# Altium PCB HX-SMJ01.pcbdoc (part 1 of 3)
Units mm, origin at the board's own origin, x right, y up, seen from the top; angles counter-clockwise.
Board outline 198.63 x 136.78 mm, 2 copper layers (Top Layer, Bottom Layer); 359 components, 358 nets, 1307 pads, 814 vias.
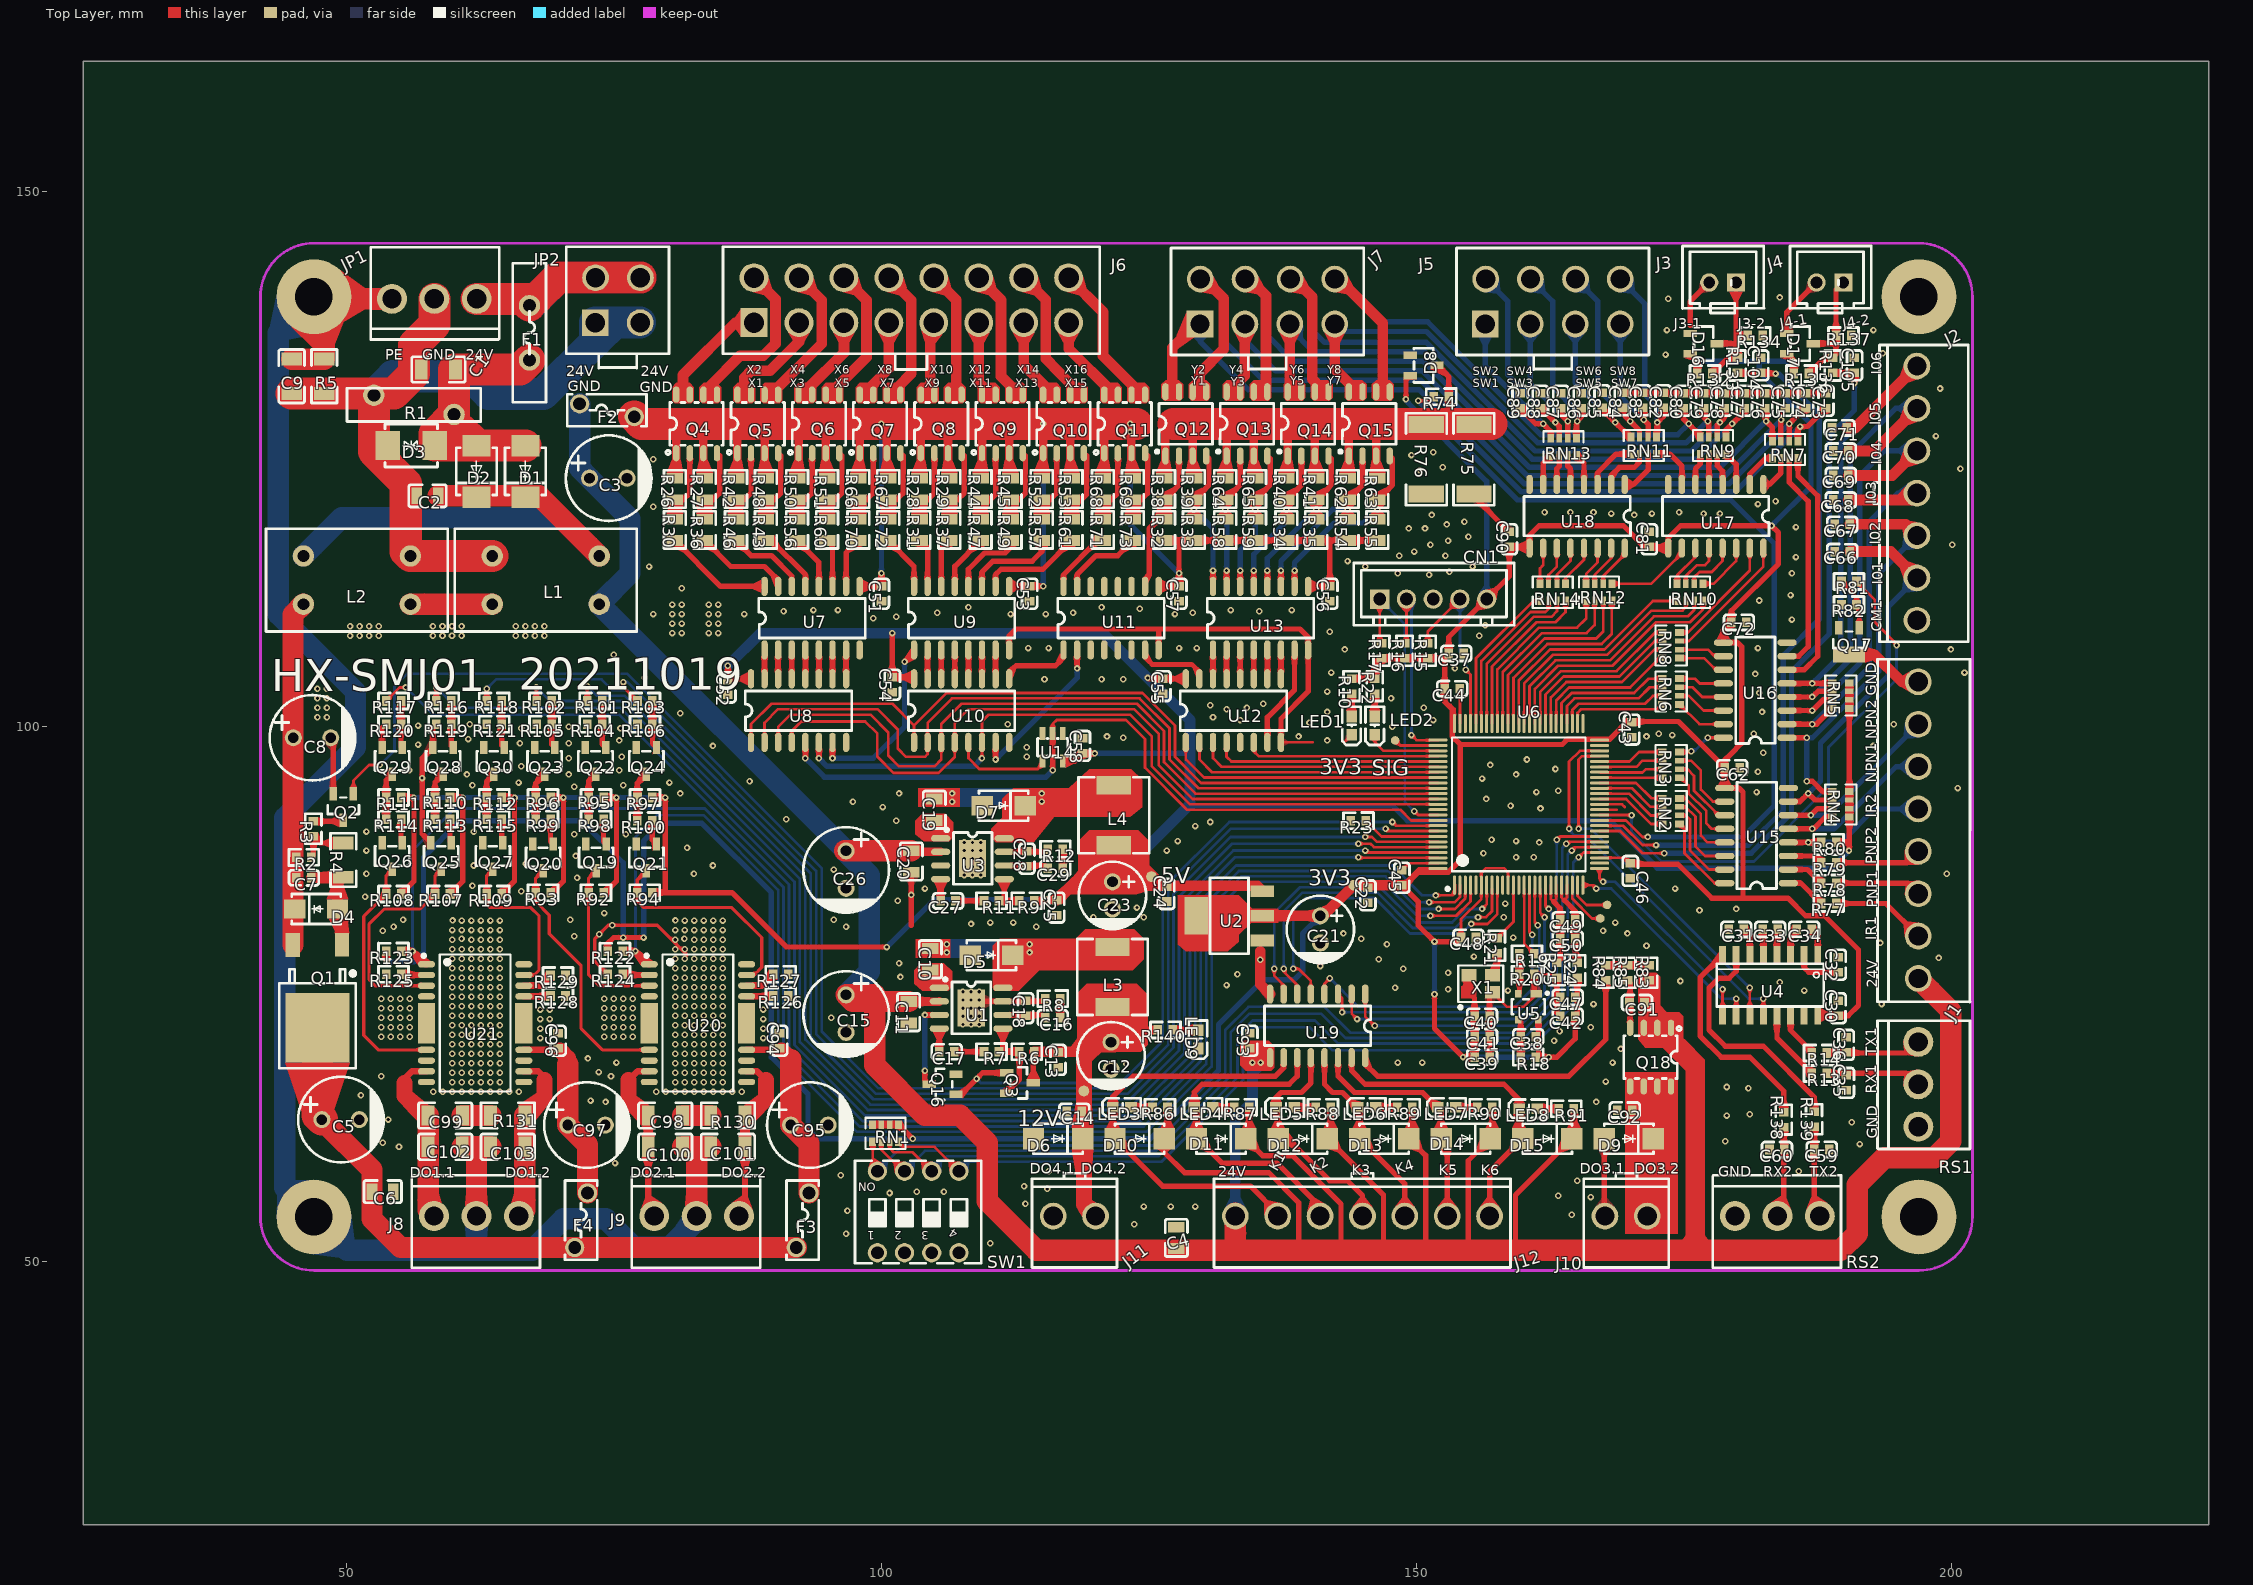
[diagram p0: Top Layer view]
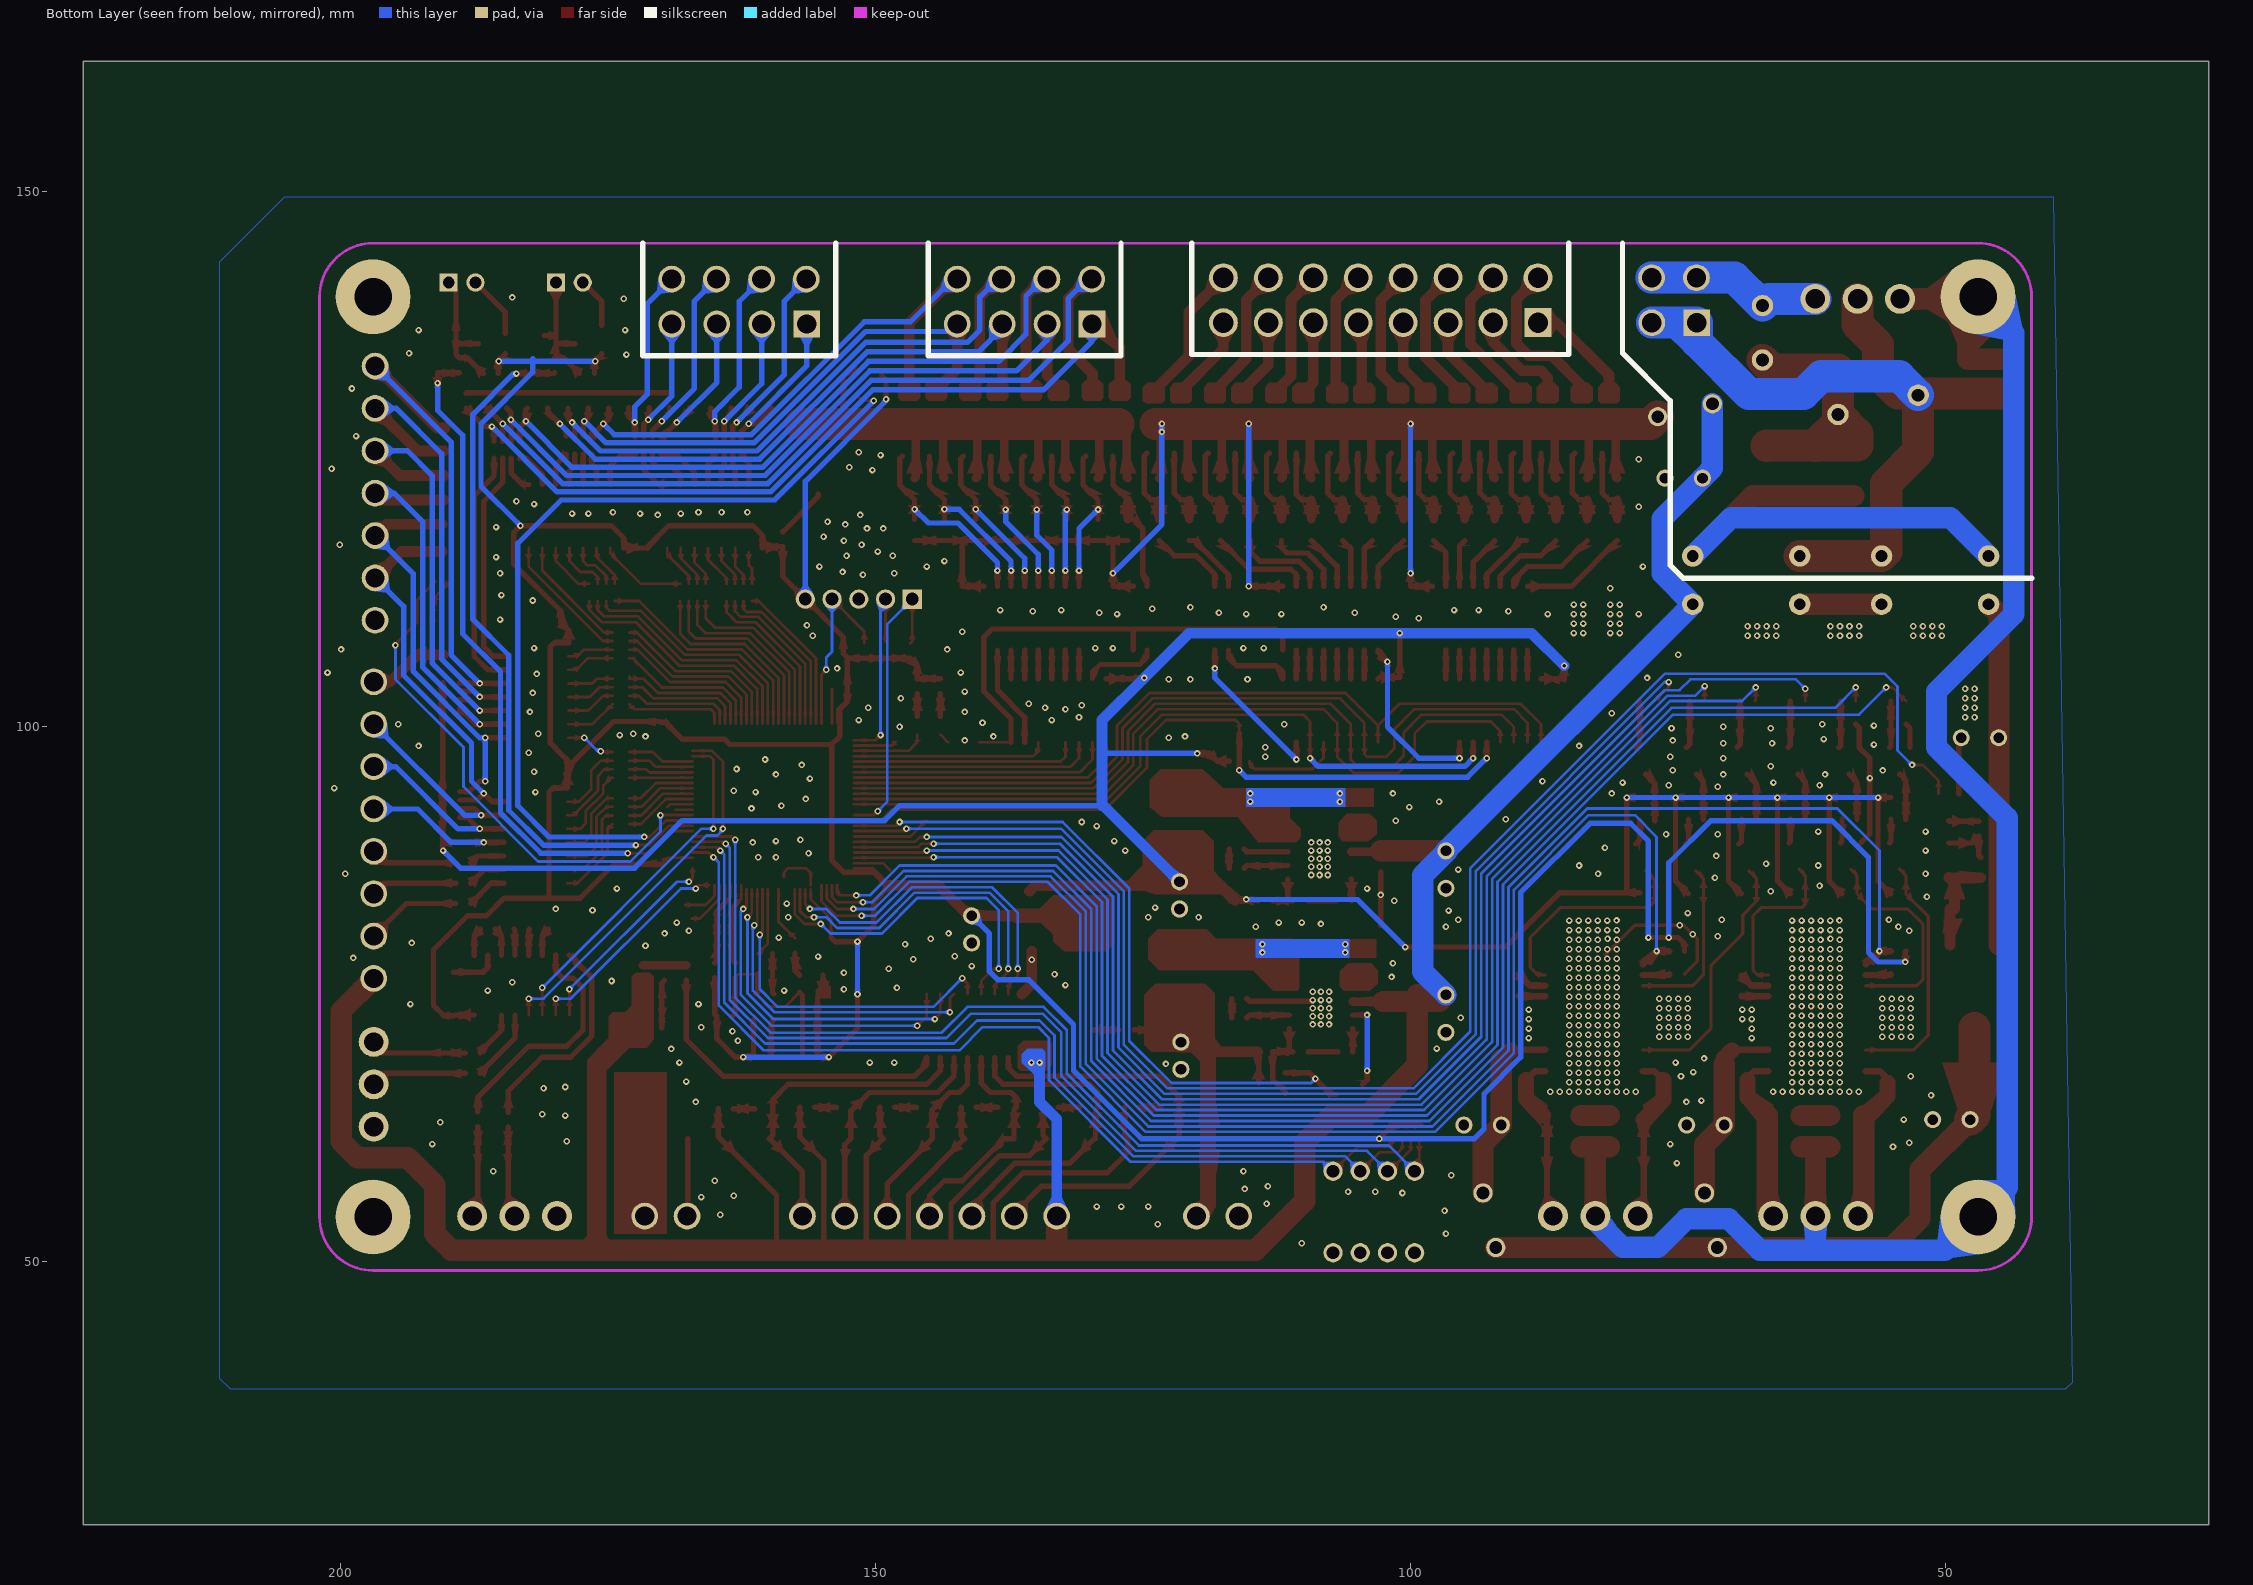
[diagram p1: Bottom Layer view, seen from below]

## Layer stack, top to bottom
Top Layer: signal copper (thickness not stored)
Dielectric: dielectric 0.32, FR-4, Dk 4.8
Bottom Layer: signal copper (thickness not stored)

## Board outline
224.028,25.4 25.4,25.4 25.4,162.179 224.028,162.179

## Components (designator, comment, footprint, x,y, rotation, side; value= is the part's Value field where it differs from the comment)
C1 "1nF/2kv" C1206 58.586,133.379 r0 top
C2 "100nF" C0805 57.57,121.568 r0 top
C3 "220uF" CAP-TH_BD8.0-P3.50-D1.0-FD 74.461,123.219 r0 top
C4 "100nF" C0805 127.546,52.226 r270 top
C5 "220uF" CAP-TH_BD8.0-P3.50-D1.0-FD 49.442,63.275 r0 top
C6 "100nF" C0805 53.378,56.544 r180 top
C7 "10nF" C0603 46.014,85.881 r180 top
C8 "220uF" CAP-TH_BD8.0-P3.50-D1.0-FD 46.775,98.962 r0 top
C9 "1nF/2kv" C1206 44.87,132.744 r270 top
C10 "100nF" C0805 104.559,78.261 r270 top
C11 "100nF" C0805 102.527,73.308 r90 top
C12 "220uF/16v" CAP-TH_BD6.3-P2.50-D1.0-FD 121.451,69.244 r270 top
C13 "100nF" C0603 116.499,68.863 r90 top
C14 "1nF" C0603 118.023,64.037 r0 top
C15 "220uF" CAP-TH_BD8.0-P3.50-D1.0-FD 96.686,73.181 r270 top
C16 "1.5nF" C0603 115.991,72.8 r180 top
C17 "8.2nF" C0603 106.085,69.625 r180 top
C18 "27pF" C0603 113.451,73.689 r270 top
C19 "100nF" C0805 104.94,92.231 r270 top
C20 "100nF" C0805 102.781,87.405 r90 top
C21 "100uF/16V" CAP-TH_BD6.3-P2.50-D1.0-FD 141.009,81.055 r270 top
C22 "100nF" C0603 145.455,84.23 r90 top
C23 "220uF/16v" CAP-TH_BD6.3-P2.50-D1.0-FD 121.578,84.23 r270 top
C24 "100nF" C0603 126.659,84.357 r90 top
C25 "1nF" C0603 116.372,83.087 r90 top
C26 "220uF" CAP-TH_BD8.0-P3.50-D1.0-FD 96.686,86.643 r270 top
C27 "8.2nF" C0603 106.212,83.722 r180 top
C28 "18pF" C0603 113.578,87.659 r270 top
C29 "820pF" C0603 116.245,86.77 r180 top
C30 "100nF" C0603 189.397,73.689 r90 top
C31 "100nF" C0603 179.872,81.055 r180 top
C32 "100nF" C0603 189.397,77.753 r270 top
C33 "100nF" C0603 183.047,81.055 r180 top
C34 "100nF" C0603 186.222,81.055 r0 top
C35 "11pF" C0603 190.158,66.704 r270 top
C36 "11pF" C0603 190.158,70.26 r90 top
C37 "100nF" C0603 153.71,106.836 r0 top
C38 "100nF" C0603 160.441,71.022 r180 top
C39 "1nF" C0603 156.123,69.117 r180 top
C40 "100nF" C0603 156.123,72.927 r0 top
C41 "100nF" C0603 156.123,71.022 r0 top
C42 "1uF" C0603 164.124,72.927 r0 top
C43 "100nF" C0603 170.093,99.724 r270 top
C44 "100nF" C0603 153.329,103.534 r0 top
C45 "100nF" C0603 148.63,85.881 r90 top
C46 "100nF" C0603 169.966,86.516 r270 top
C47 "100nF" C0603 164.124,74.705 r180 top
C48 "100nF" C0603 154.853,80.293 r0 top
C49 "100nF" C0603 164.124,81.944 r180 top
C50 "100nF" C0603 164.124,80.166 r180 top
C51 "100nF" C0603 99.989,112.424 r90 top
C52 "100nF" C0603 85.638,103.661 r270 top
C53 "100nF" C0603 113.832,112.424 r270 top
C54 "100nF" C0603 101.005,103.915 r270 top
C55 "100nF" C0603 126.278,103.788 r270 top
C56 "100nF" C0603 141.899,112.424 r90 top
C57 "100nF" C0603 127.802,112.424 r90 top
C58 "100nF" C0603 118.785,98.2 r90 top
C59 "11pF" C0603 187.872,60.481 r0 top
C60 "11pF" C0603 183.681,60.481 r180 top
C62 "100nF" C0603 179.491,96.168 r180 top
C66 "100nF" C0603 189.777,116.361 r180 top
C67 "100nF" C0603 189.777,118.901 r180 top
C68 "100nF" C0603 189.65,121.187 r180 top
C69 "100nF" C0603 189.65,123.473 r180 top
C70 "100nF" C0603 189.65,125.759 r180 top
C71 "100nF" C0603 189.523,127.918 r0 top
C72 "100nF" C0603 180.126,109.757 r180 top
C73 "100nF" C0603 188.253,130.458 r270 top
C74 "100nF" C0603 186.348,130.458 r270 top
C75 "100nF" C0603 184.443,130.458 r270 top
C76 "100nF" C0603 182.538,130.458 r270 top
C77 "100nF" C0603 180.633,130.458 r270 top
C78 "100nF" C0603 178.728,130.458 r270 top
C79 "100nF" C0603 176.823,130.458 r270 top
C80 "100nF" C0603 174.918,130.458 r270 top
C81 "100nF" C0603 171.744,117.504 r270 top
C82 "100nF" C0603 173.054,130.499 r90 top
C83 "100nF" C0603 171.149,130.499 r90 top
C84 "100nF" C0603 169.244,130.499 r90 top
C85 "100nF" C0603 167.339,130.499 r90 top
C86 "100nF" C0603 165.393,130.458 r90 top
C87 "100nF" C0603 163.488,130.458 r90 top
C88 "100nF" C0603 161.583,130.458 r90 top
C89 "100nF" C0603 159.678,130.458 r90 top
C90 "100nF" C0603 158.663,117.504 r270 top
C91 "1nF" C0603 170.6,74.197 r0 top
C92 "100nF" C0603 169.458,64.164 r0 top
C93 "100nF" C0603 134.406,70.641 r270 top
C94 "100nF" C0603 90.464,70.641 r270 top
C95 "220uF" CAP-TH_BD8.0-P3.50-D1.0-FD 93.257,62.767 r0 top
C96 "100nF" C0603 69.763,70.641 r270 top
C97 "220uF" CAP-TH_BD8.0-P3.50-D1.0-FD 72.429,62.767 r0 top
C98 "100nF" C1206 79.795,63.656 r0 top
C99 "100nF" C1206 59.221,63.656 r0 top
C100 "1nF/2kv" C1206 79.795,60.735 r180 top
C101 "1nF/2kv" C1206 85.637,60.735 r0 top
C102 "1nF/2kv" C1206 59.221,60.735 r180 top
C103 "1nF/2kv" C1206 65.063,60.735 r0 top
C104 "1nF" C0603 182.158,133.76 r270 top
C105 "1nF" C0603 190.921,133.76 r270 top
CN1 "XH-5A" CONN-TH_5P-P2.50_XH-5A 151.551,111.916 r0 top
D1 "SS56BF" SMBF_L4.3-W3.6-LS5.3-RD 66.714,123.854 r90 top
D2 "SS56BF" SMBF_L4.3-W3.6-LS5.3-RD 62.142,123.854 r90 top
D3 "P6SMB24CA" SMB_L4.6-W3.6-LS5.3-BI 56.046,126.268 r0 top
D4 "1SMA4744A" SMA_L4.4-W2.6-LS5.0-RD 47.155,82.96 r0 top
D5 "SS34_C115205" SMA_L4.4-W2.6-LS5.0-RD 110.274,78.642 r180 top
D6 "M7_C95872" DO-214AC_L4.3-W2.7-LS5.3-RD 116.497,61.497 r180 top
D7 "SS34_C115205" SMA_L4.4-W2.6-LS5.0-RD 111.417,92.612 r180 top
D8 "BAT54S,215" SOT-23-3_L3.0-W1.7-P0.95-LS2.9-BR 150.661,133.76 r180 top
D9 "M7_C95872" DO-214AC_L4.3-W2.7-LS5.3-RD 169.837,61.497 r180 top
D10 "M7_C95872" DO-214AC_L4.3-W2.7-LS5.3-RD 124.117,61.497 r180 top
D11 "M7_C95872" DO-214AC_L4.3-W2.7-LS5.3-RD 131.737,61.497 r180 top
D12 "M7_C95872" DO-214AC_L4.3-W2.7-LS5.3-RD 139.357,61.497 r180 top
D13 "M7_C95872" DO-214AC_L4.3-W2.7-LS5.3-RD 146.977,61.497 r180 top
D14 "M7_C95872" DO-214AC_L4.3-W2.7-LS5.3-RD 154.597,61.497 r180 top
D15 "M7_C95872" DO-214AC_L4.3-W2.7-LS5.3-RD 162.217,61.497 r180 top
D16 "BAT54S,215" SOT-23-3_L3.0-W1.7-P0.95-LS2.9-BR 176.823,135.792 r180 top
D17 "BAT54S,215" SOT-23-3_L3.0-W1.7-P0.95-LS2.9-BR 185.84,135.792 r180 top
F1 "JK30-400_C369107" FUSE-TH_L13.0-W3.1-P5.08-D1.2 67.095,136.808 r270 top
F2 "A30-050" FUSE-TH_L7.4-W3.0-P5.10-D0.6-S1.20 74.334,129.569 r0 top
F3 "A30-050" FUSE-TH_L7.4-W3.0-P5.10-D0.6-S1.20 92.622,53.877 r90 top
F4 "A30-050" FUSE-TH_L7.4-W3.0-P5.10-D0.6-S1.20 71.921,53.877 r90 top
J1 "VH3.96-8A_C75270" "CONN-TH_VH3.96-8A 8P" 196.89,90.326 r90 top
J2 "A3963WV-7P" CONN-TH_A3963WV-7P 196.762,121.822 r90 top
J3 "XHB-2A Connector" CONN-TH_XHB-2A 178.602,141.507 r0 top
J4 "XHB-2A Connector" CONN-TH_XHB-2A 188.635,141.507 r0 top
J5 "5557S-2*4P" CONN-TH_8P-P4.20_5557S-2*4P 162.727,139.729 r0 top
J6 "5557S-2*8P" CONN-TH_16P-P4.20_5557S-2X8P 102.782,139.855 r0 top
J7 "5557S-2*4P" CONN-TH_8P-P4.20_5557S-2*4P 136.057,139.729 r0 top
J8 "VH3.96-3A" CONN-TH_3P-P3.96_VH3.96-3A 62.143,54.258 r0 top
J9 "VH3.96-3A" CONN-TH_3P-P3.96_VH3.96-3A 82.717,54.258 r0 top
J10 "A3963WV-2P" CONN-TH_A3963WV-2P 169.584,54.258 r0 top
J11 "A3963WV-2P" CONN-TH_A3963WV-2P 118.022,54.258 r0 top
J12 "A3963WV-7P" CONN-TH_A3963WV-7P 144.946,54.258 r0 top
JP1 "VH3.96-3A" CONN-TH_3P-P3.96_VH3.96-3A 58.206,139.983 r180 top
JP2 "5557S-2*2P" CONN-TH_4P-P4.20_5557S-2*2P 75.35,139.856 r0 top
L1 "MORNSUN" FILTER-TH_4P-L17.0-W9.6-P10.00-D0.7-S4.50_FL2D-Z5 68.619,113.694 r180 top
L2 "MORNSUN" FILTER-TH_4P-L17.0-W9.6-P10.00-D0.7-S4.50_FL2D-Z5 50.966,113.694 r180 top
L3 "15uH" IND-SMD_L7.1-W6.6_SLO0618H 121.579,76.61 r270 top
L4 "15uH" IND-SMD_L7.1-W6.6_SLO0618H 121.706,91.723 r270 top
LED1 "BL-HUB36G-AV-TRB" LED0603-R-RD 143.93,100.105 r90 top
LED2 "BL-HUB36G-AV-TRB" LED0603-R-RD 146.089,100.105 r90 top
LED3 "19-217/GHC-YR1S2/3T" LED0603-R-RD 122.467,64.418 r0 top
LED4 "19-217/GHC-YR1S2/3T" LED0603-R-RD 130.087,64.418 r0 top
LED5 "19-217/GHC-YR1S2/3T" LED0603-R-RD 137.707,64.418 r0 top
LED6 "19-217/GHC-YR1S2/3T" LED0603-R-RD 145.327,64.418 r0 top
LED7 "19-217/GHC-YR1S2/3T" LED0603-R-RD 152.82,64.418 r0 top
LED8 "19-217/GHC-YR1S2/3T" LED0603-R-RD 160.44,64.291 r0 top
LED9 "BL-HUB36G-AV-TRB" LED0603-R-RD 129.579,70.768 r90 top
Q1 "IRFR5410TRPBF" TO-252-2_L6.5-W6.1-P4.58-LS10.0-TR 47.283,75.721 r0 top
Q2 "MMUN2233LT1G" SOT-23-3_L2.9-W1.3-P1.90-LS2.4-BR 49.696,92.485 r90 top
Q3 "MMUN2233LT1G" SOT-23-3_L2.9-W1.3-P1.90-LS2.4-BR 112.942,66.704 r180 top
Q4 "NCE4953" SOIC-8_L4.9-W3.9-P1.27-LS6.0-BL 82.716,128.299 r0 top
Q5 "NCE4953" SOIC-8_L4.9-W3.9-P1.27-LS6.0-BL 88.431,128.299 r0 top
Q6 "NCE4953" SOIC-8_L4.9-W3.9-P1.27-LS6.0-BL 94.146,128.299 r0 top
Q7 "NCE4953" SOIC-8_L4.9-W3.9-P1.27-LS6.0-BL 99.861,128.299 r0 top
Q8 "NCE4953" SOIC-8_L4.9-W3.9-P1.27-LS6.0-BL 105.576,128.299 r0 top
Q9 "NCE4953" SOIC-8_L4.9-W3.9-P1.27-LS6.0-BL 111.291,128.299 r0 top
Q10 "NCE4953" SOIC-8_L4.9-W3.9-P1.27-LS6.0-BL 117.006,128.299 r0 top
Q11 "NCE4953" SOIC-8_L4.9-W3.9-P1.27-LS6.0-BL 122.721,128.299 r0 top
Q12 "NCE6005AS" SOP-8_L4.9-W3.9-P1.27-LS6.0-BL 128.436,128.299 r0 top
Q13 "NCE6005AS" SOP-8_L4.9-W3.9-P1.27-LS6.0-BL 134.151,128.299 r0 top
Q14 "NCE6005AS" SOP-8_L4.9-W3.9-P1.27-LS6.0-BL 139.866,128.299 r0 top
Q15 "NCE6005AS" SOP-8_L4.9-W3.9-P1.27-LS6.0-BL 145.581,128.299 r0 top
Q16 "MMUN2233LT1G" SOT-23-3_L2.9-W1.3-P1.90-LS2.4-BR 105.703,66.577 r0 top
Q17 "NCE3400" SOT-23-3_L2.9-W1.6-P1.90-LS2.8-BR 190.412,107.979 r90 top
Q18 "NCE3007S" SOIC-8_L4.9-W3.9-P1.27-LS6.0-BL 171.87,69.117 r180 top
Q19 "MMBT5551LT1G" SOT-23-3_L3.0-W1.7-P0.95-LS2.9-BR 73.318,87.786 r90 top
Q20 "MMBT5551LT1G" SOT-23-3_L3.0-W1.7-P0.95-LS2.9-BR 68.365,87.786 r90 top
Q21 "MMBT5551LT1G" SOT-23-3_L3.0-W1.7-P0.95-LS2.9-BR 78.017,87.786 r90 top
Q22 "MMBT5551LT1G" SOT-23-3_L3.0-W1.7-P0.95-LS2.9-BR 73.267,96.803 r90 top
Q23 "MMBT5551LT1G" SOT-23-3_L3.0-W1.7-P0.95-LS2.9-BR 68.517,96.803 r90 top
Q24 "MMBT5551LT1G" SOT-23-3_L3.0-W1.7-P0.95-LS2.9-BR 78.017,96.803 r90 top
Q25 "MMBT5551LT1G" SOT-23-3_L3.0-W1.7-P0.95-LS2.9-BR 58.84,87.913 r90 top
Q26 "MMBT5551LT1G" SOT-23-3_L3.0-W1.7-P0.95-LS2.9-BR 54.268,87.913 r90 top
Q27 "MMBT5551LT1G" SOT-23-3_L3.0-W1.7-P0.95-LS2.9-BR 63.666,87.913 r90 top
Q28 "MMBT5551LT1G" SOT-23-3_L3.0-W1.7-P0.95-LS2.9-BR 59.018,96.803 r90 top
Q29 "MMBT5551LT1G" SOT-23-3_L3.0-W1.7-P0.95-LS2.9-BR 54.268,96.803 r90 top
Q30 "MMBT5551LT1G" SOT-23-3_L3.0-W1.7-P0.95-LS2.9-BR 63.768,96.803 r90 top
R1 "390KD10" RES-TH_L12.5-W3.1-P7.50-D1.2-S1.80 56.3,130.077 r0 top
R2 "2K" R0603 46.013,87.786 r180 top
R3 "2K" R0603 46.902,90.453 r270 top
R4 "51" R1206 49.696,87.532 r90 top
R5 "1M" R1206 47.918,132.744 r270 top
R6 "14K" R0603 113.578,69.625 r0 top
R7 "1K" R0603 110.276,69.625 r0 top
R8 "44.2K" R0603 115.991,74.578 r0 top
R9 "10.2K" R0603 113.578,83.722 r0 top
R10 "2K" R0603 143.931,103.788 r90 top
R11 "1.96K" R0603 110.276,83.722 r0 top
R12 "56.2K 1%" R0603 116.245,88.548 r0 top
R13 "33" R0603 187.618,67.593 r180 top
R14 "33" R0603 187.618,69.498 r180 top
R15 "10K" R0603 151.043,107.09 r270 top
R16 "10K" R0603 148.884,107.09 r270 top
R17 "10K" R0603 146.725,107.09 r270 top
R18 "10K" R0603 160.441,69.117 r0 top
R19 "10K" R0603 160.314,78.769 r0 top
R20 "10K" R0603 160.314,76.864 r180 top
R21 "33" R0603 157.52,79.531 r270 top
R22 "2K" R0603 146.09,103.788 r90 top
R23 "10K" R0603 144.566,91.215 r0 top
R24 "0" R0603 165.013,77.245 r90 top
R25 "0" R0603 163.108,77.245 r90 top
R26 "10K" R0805 80.683,122.203 r270 top
R27 "10K" R0805 83.477,122.203 r90 top
R28 "10K" R0805 103.543,122.203 r270 top
R29 "10K" R0805 106.337,122.203 r90 top
R30 "10K" R0805 80.683,118.393 r90 top
R31 "10K" R0805 103.543,118.393 r90 top
R32 "10K" R0805 126.403,118.393 r90 top
R33 "10K" R0805 129.197,118.393 r270 top
R34 "10K" R0805 137.833,118.393 r90 top
R35 "10K" R0805 140.627,118.393 r270 top
R36 "10K" R0805 83.477,118.393 r270 top
R37 "10K" R0805 106.337,118.393 r270 top
R38 "10K" R0805 126.403,122.203 r270 top
R39 "10K" R0805 129.197,122.203 r90 top
R40 "10K" R0805 137.833,122.203 r270 top
R41 "10K" R0805 140.627,122.203 r90 top
R42 "10K" R0805 86.398,122.203 r270 top
R43 "10K" R0805 89.192,122.203 r90 top
R44 "10K" R0805 109.258,122.203 r270 top
R45 "10K" R0805 112.052,122.203 r90 top
R46 "10K" R0805 86.398,118.393 r90 top
R47 "10K" R0805 109.258,118.393 r90 top
R48 "10K" R0805 89.192,118.393 r270 top
R49 "10K" R0805 112.052,118.393 r270 top
R50 "10K" R0805 92.113,122.203 r270 top
R51 "10K" R0805 94.907,122.203 r90 top
R52 "10K" R0805 114.973,122.203 r270 top
R53 "10K" R0805 117.767,122.203 r90 top
R54 "10K" R0805 143.548,118.393 r90 top
R55 "10K" R0805 146.342,118.393 r270 top
R56 "10K" R0805 92.113,118.393 r90 top
R57 "10K" R0805 114.973,118.393 r90 top
R58 "10K" R0805 132.118,118.393 r90 top
R59 "10K" R0805 134.912,118.393 r270 top
R60 "10K" R0805 94.907,118.393 r270 top
R61 "10K" R0805 117.767,118.393 r270 top
R62 "10K" R0805 143.548,122.203 r270 top
R63 "10K" R0805 146.342,122.203 r90 top
R64 "10K" R0805 132.118,122.203 r270 top
R65 "10K" R0805 134.912,122.203 r90 top
R66 "10K" R0805 97.828,122.203 r270 top
R67 "10K" R0805 100.622,122.203 r90 top
R68 "10K" R0805 120.688,122.203 r270 top
R69 "10K" R0805 123.482,122.203 r90 top
R70 "10K" R0805 97.828,118.393 r90 top
R71 "10K" R0805 120.688,118.393 r90 top
R72 "10K" R0805 100.622,118.393 r270 top
R73 "10K" R0805 123.482,118.393 r270 top
R74 "1K" R0603 152.312,130.839 r0 top
R75 "1" R2512 155.359,124.997 r90 top
R76 "1" R2512 150.914,124.997 r90 top
R77 "10K" R0603 188.508,83.468 r0 top
R78 "10K" R0603 188.508,85.373 r0 top
R79 "10K" R0603 188.508,87.278 r0 top
R80 "10K" R0603 188.508,89.183 r0 top
R81 "2K" R0603 190.412,113.567 r0 top
R82 "10K" R0603 190.412,111.408 r0 top
R83 "10K" R0603 171.744,76.991 r90 top
R84 "10K" R0603 167.68,76.991 r90 top
R85 "51R" R0603 169.712,76.991 r270 top
R86 "10K" R0603 126.024,64.418 r0 top
R87 "10K" R0603 133.644,64.418 r0 top
R88 "10K" R0603 141.264,64.418 r0 top
R89 "10K" R0603 148.884,64.418 r0 top
R90 "10K" R0603 156.377,64.418 r0 top
R91 "10K" R0603 163.997,64.291 r0 top
R92 "10K" R0603 73.319,84.484 r180 top
R93 "10K" R0603 68.366,84.484 r180 top
R94 "10K" R0603 77.865,84.484 r180 top
R95 "510" R0603 73.319,93.374 r0 top
R96 "510" R0603 68.366,93.374 r0 top
R97 "510" R0603 77.891,93.374 r0 top
R98 "1K" R0603 73.319,91.342 r0 top
R99 "1K" R0603 68.366,91.342 r0 top
R100 "1K" R0603 77.865,91.215 r0 top
R101 "1K" R0603 73.192,102.391 r0 top
R102 "1K" R0603 68.493,102.391 r0 top
R103 "1K" R0603 77.891,102.391 r0 top
R104 "10K" R0603 73.192,100.232 r180 top
R105 "10K" R0603 68.493,100.232 r180 top
R106 "10K" R0603 77.891,100.232 r180 top
R107 "10K" R0603 58.968,84.357 r180 top
R108 "10K" R0603 54.396,84.357 r180 top
R109 "10K" R0603 63.794,84.357 r180 top
R110 "510" R0603 58.968,93.374 r0 top
R111 "510" R0603 54.396,93.374 r0 top
R112 "510" R0603 63.794,93.374 r0 top
R113 "1K" R0603 58.968,91.342 r0 top
R114 "1K" R0603 54.396,91.342 r0 top
R115 "1K" R0603 63.794,91.342 r0 top
R116 "1K" R0603 59.095,102.391 r0 top
R117 "1K" R0603 54.396,102.391 r0 top
R118 "1K" R0603 63.794,102.391 r0 top
R119 "10K" R0603 59.095,100.232 r180 top
R120 "10K" R0603 54.396,100.232 r180 top
R121 "10K" R0603 63.794,100.232 r180 top
R122 "20K" R0603 75.097,79.023 r180 top
R123 "20K" R0603 54.396,79.023 r180 top
R124 "0" R0603 75.097,76.864 r0 top
R125 "0" R0603 54.396,76.864 r0 top
R126 "10K" R0603 90.591,74.832 r0 top
R127 "0" R0603 90.591,76.864 r180 top
R128 "10K" R0603 69.763,74.832 r0 top
R129 "0" R0603 69.763,76.737 r180 top
R130 "51" R1206 85.637,63.656 r0 top
R131 "51" R1206 65.063,63.656 r0 top
R132 "10K" R0603 176.95,132.998 r180 top
R133 "1K" R0603 179.998,133.76 r270 top
R134 "300K" R0603 181.65,136.554 r180 top
R135 "10K" R0603 185.967,132.998 r180 top
R136 "1K" R0603 188.888,133.76 r270 top
R137 "300K" R0603 189.905,136.554 r180 top
R138 "33" R0603 184.316,63.275 r90 top
R139 "33" R0603 187.154,63.315 r90 top
R140 "10K" R0603 126.531,71.657 r0 top
RN1 "10K" RES-ARRAY-SMD_0603-8P-L3.2-W1.6-BL 100.369,62.005 r180 top
RN2 "1K" RES-ARRAY-SMD_0603-8P-L3.2-W1.6-BL 173.775,92.104 r270 top
RN3 "1K" RES-ARRAY-SMD_0603-8P-L3.2-W1.6-BL 173.775,96.422 r270 top
RN4 "10K" RES-ARRAY-SMD_0603-8P-L3.2-W1.6-BL 189.65,92.739 r270 top
RN5 "10K" RES-ARRAY-SMD_0603-8P-L3.2-W1.6-BL 189.65,102.899 r270 top
RN6 "1K" RES-ARRAY-SMD_0603-8P-L3.2-W1.6-BL 173.775,103.28 r270 top
RN7 "10K" RES-ARRAY-SMD_0603-8P-L3.2-W1.6-BL 184.443,125.886 r0 top
RN8 "1K" RES-ARRAY-SMD_0603-8P-L3.2-W1.6-BL 173.775,107.598 r270 top
RN9 "10K" RES-ARRAY-SMD_0603-8P-L3.2-W1.6-BL 177.712,126.267 r0 top
RN10 "1K" RES-ARRAY-SMD_0603-8P-L3.2-W1.6-BL 175.553,112.551 r0 top
RN11 "10K" RES-ARRAY-SMD_0603-8P-L3.2-W1.6-BL 171.235,126.267 r0 top
RN12 "1K" RES-ARRAY-SMD_0603-8P-L3.2-W1.6-BL 167.044,112.551 r0 top
RN13 "10K" RES-ARRAY-SMD_0603-8P-L3.2-W1.6-BL 163.742,126.14 r0 top
RN14 "1K" RES-ARRAY-SMD_0603-8P-L3.2-W1.6-BL 162.726,112.551 r0 top
RS1 "VH3.96-3A" CONN-TH_3P-P3.96_VH3.96-3A 196.889,66.578 r90 top
RS2 "VH3.96-3A" CONN-TH_3P-P3.96_VH3.96-3A 183.725,54.258 r0 top
SW1 "DSWB04LHGET" SW-TH_DSWB04LHGET 103.417,54.639 r0 top
U1 "TPS54331DDAR" SOIC-8_L5.0-W4.0-P1.27-LS6.0-BL-EP 108.37,73.689 r270 top
U2 "AMS1117-3.3_C347222" SOT-223_L6.7-W3.5-P2.30-BR 132.5,82.325 r0 top
U3 "TPS54331DDAR" SOIC-8_L5.0-W4.0-P1.27-LS6.0-BL-EP 108.497,87.659 r270 top
U4 "MAX3232EID" SOIC16N 183.046,75.848 r180 top
U5 "CAT811STBI-GT3" SOT-143_L2.9-W1.3-P1.92-LS2.3-BL 160.44,73.816 r180 top
U6 "STM32F103VCT6" LQFP-100_L14.0-W14.0-P0.50-LS16.0-BL 159.551,92.739 r0 top
U7 "ULN2003AIDR" SOIC-16_L9.9-W3.9-P1.27-LS6.0-BL 93.511,110.138 r0 top
U8 "74HC237D,653" SOIC-16_L9.9-W3.9-P1.27-LS6.0-BL 92.241,101.502 r0 top
U9 "ULN2003AIDR" SOIC-16_L9.9-W3.9-P1.27-LS6.0-BL 107.481,110.138 r0 top
U10 "74HC237D,653" SOIC-16_L9.9-W3.9-P1.27-LS6.0-BL 107.481,101.502 r0 top
U11 "ULN2003AIDR" SOIC-16_L9.9-W3.9-P1.27-LS6.0-BL 121.451,110.138 r0 top
U12 "74HC137D,653" SOIC-16_L9.9-W3.9-P1.27-LS6.0-BL 132.881,101.502 r0 top
U13 "ULN2003AIDR" SOIC-16_L9.9-W3.9-P1.27-LS6.0-BL 135.421,110.138 r0 top
U14 "74HC1G04GV,125" SOT-753_L3.1-W1.7-P0.95-LS3.0-BR 115.99,98.073 r90 top
U15 "ULN2003AIDR" SOIC-16_L9.9-W3.9-P1.27-LS6.0-BL 181.776,89.818 r90 top
U16 "ULN2003AIDR" SOIC-16_L9.9-W3.9-P1.27-LS6.0-BL 181.649,103.407 r90 top
U17 "ULN2003AIDR" SOIC-16_L9.9-W3.9-P1.27-LS6.0-BL 177.966,119.663 r180 top
U18 "ULN2003AIDR" SOIC-16_L9.9-W3.9-P1.27-LS6.0-BL 165.012,119.663 r180 top
U19 "ULN2003AIDR" SOIC-16_L9.9-W3.9-P1.27-LS6.0-BL 140.755,72.038 r180 top
U20 "TB6642FG" HSOP-16_L13.5-W6.4-P1.00-LS9.6-BL-EP 82.843,72.293 r270 top
U21 "TB6642FG" HSOP-16_L13.5-W6.4-P1.00-LS9.6-BL-EP 62.015,72.293 r270 top
X1 "8MHz" OSC-SMD_4P-L3.2-W2.5-BL 155.995,75.975 r0 top

## Footprints (in the part's own frame and the unit in brackets; to place one, negate y for a bottom-side part, rotate by r counter-clockwise, add the part's x,y. Pads: shape width x height; smd on the part's side, far side on the other; paste and mask are expansions set on the pad)
C0603 [mm]
  rect 0.8x0.9 smd: 1(-0.7,0) 2(0.7,0)
  silkscreen extent -1.4,-0.7 1.4,0.72
C0805 [mm]
  rect 1x1.55 smd: 1(-1,0) 2(1,0)
  silkscreen extent -1.75,-1.04 1.75,1.04
C1206 [mm]
  rect 1.2x1.9 smd: 1(-1.6,0) 2(1.6,0)
  silkscreen extent -2.5,-1.2 2.5,1.2
CAP-TH_BD6.3-P2.50-D1.0-FD [mm]
  round 1.6 hole 1: 1(-1.27,0) 2(1.27,0)
  silkscreen extent -3.15,-3.15 3.17,3.15
CAP-TH_BD8.0-P3.50-D1.0-FD [mm]
  round 1.6 hole 1: 1(-1.75,0) 2(1.75,0)
  silkscreen extent -3.96,-4 4.04,4
CONN-TH_3P-P3.96_VH3.96-3A [mm]
  round 2.8 hole 1.8: 1(-3.961,0) 2(-0.001,0) 3(3.961,0)
  silkscreen extent -6.05,-4.83 5.94,3.81
CONN-TH_4P-P4.20_5557S-2*2P [mm]
  rect 2.5x2.5 hole 1.8: 1(-2.111,-2.101)
  round 2.5 hole 1.8: 2(-2.078,2.101) 3(2.09,-2.101) 4(2.111,2.101)
  silkscreen extent -4.81,-6.35 4.79,5
CONN-TH_5P-P2.50_XH-5A [mm]
  rect 1.8x1.8 hole 1.199: 1(-5,0)
  round 1.8 hole 1.199: 2(-2.498,0) 3(0.001,0) 4(2.501,0) 5(5,0)
  silkscreen extent -7.42,-2.44 7.58,3.37
CONN-TH_8P-P4.20_5557S-2*4P [mm]
  rect 2.5x2.5 hole 1.8: 1(-6.301,-2.1)
  round 2.5 hole 1.8: 2(-6.27,2.101) 3(-2.101,-2.101) 4(-2.081,2.101) 5(2.1,-2.101) 6(2.13,2.101) 7(6.301,-2.101) 8(6.301,2.101)
  silkscreen extent -9,-6.35 9,5
CONN-TH_16P-P4.20_5557S-2X8P [mm]
  rect 2.5x2.7 hole 1.9: 1(-14.7,-2.1)
  round 2.7 hole 1.9: 2(-14.7,2.1) 3(-10.5,-2.1) 4(-10.5,2.1) 5(-6.3,-2.1) 6(-6.3,2.1) 7(-2.1,-2.1) 8(-2.1,2.1) 9(2.1,-2.1) 10(2.1,2.1) 11(6.3,-2.1) 12(6.3,2.1) 13(10.5,-2.1) 14(10.5,2.1) 15(14.7,-2.1) 16(14.7,2.1)
  silkscreen extent -17.6,-6.48 17.6,5
CONN-TH_A3963WV-2P [mm]
  round 2.5 hole 1.8: 1(-1.98,0) 2(1.98,0)
  silkscreen extent -3.96,-4.8 3.98,4
CONN-TH_A3963WV-7P [mm]
  round 2.5 hole 1.8: 1(-11.88,0) 2(-7.92,0) 3(-3.96,0) 4(0,0) 5(3.96,0) 6(7.92,0) 7(11.88,0)
  silkscreen extent -13.88,-4.8 13.84,4
"CONN-TH_VH3.96-8A 8P" [mm]
  round 2.5 hole 1.8: 1(-13.86,0) 2(-9.9,0) 3(-5.94,0) 4(-1.98,0) 5(1.98,0) 6(5.94,0) 7(9.9,0) 8(13.86,0)
  silkscreen extent -16.09,-4.83 15.98,3.81
CONN-TH_XHB-2A [mm]
  rect 1.7x1.7 hole 1.1: 1(1.251,0)
  round 1.7 hole 1.1: 2(-1.251,0)
  silkscreen extent -3.75,-2.84 3.86,3.4
DO-214AC_L4.3-W2.7-LS5.3-RD [mm]
  rect 2x2 smd: 1(-2.3,0) 2(2.3,0)
  silkscreen extent -2.3,-1.4 2.3,1.4
FILTER-TH_4P-L17.0-W9.6-P10.00-D0.7-S4.50_FL2D-Z5 [mm]
  round 2 hole 1.1: 1(-5,-2.25) 2(5,-2.25) 3(5,2.25) 4(-5,2.25)
  silkscreen extent -8.5,-4.8 8.5,4.8
FUSE-TH_L7.4-W3.0-P5.10-D0.6-S1.20 [mm]
  round 1.8 hole 1.2: 1(-2.55,0.6) 2(2.55,-0.6)
  silkscreen extent -3.7,-1.5 3.7,1.5
FUSE-TH_L13.0-W3.1-P5.08-D1.2 [mm]
  round 2 hole 1.2: 1(-2.54,0) 2(2.54,0)
  silkscreen extent -6.5,-1.55 6.5,1.55
HSOP-16_L13.5-W6.4-P1.00-LS9.6-BL-EP [mm]
  rect 3.8x1.6 smd: 0(0,4.55) 0(0,-4.55)
  oval 0.6x1.6 smd: 1(-5.5,-4.55) 2(-4.5,-4.55) 3(-3.5,-4.55) 4(-2.5,-4.55) 5(2.5,-4.55) 6(3.5,-4.55) 7(4.5,-4.55) 8(5.5,-4.55) 9(5.5,4.55) 10(4.5,4.55) 11(3.5,4.55) 12(2.5,4.55) 13(-2.5,4.55) 14(-3.5,4.55) 15(-4.5,4.55) 16(-5.5,4.55)
  silkscreen extent -6.45,-4.95 6.4,3.3
IND-SMD_L7.1-W6.6_SLO0618H [mm]
  rect 1.7x3.2 smd: 1(-2.8,0) 2(2.8,0)
  silkscreen extent -3.55,-3.3 3.55,3.3
LED0603-R-RD [mil]
  rect 43x39 smd: 1(33.5,0) 2(-33.5,0)
  silkscreen extent -72,-34 70,34
LQFP-100_L14.0-W14.0-P0.50-LS16.0-BL [mm]
  oval 0.28x1.8 smd: 1(-6,-7.55) 2(-5.5,-7.55) 3(-5,-7.55) 4(-4.5,-7.55) 5(-4,-7.55) 6(-3.5,-7.55) 7(-3,-7.55) 8(-2.5,-7.55) 9(-2,-7.55) 10(-1.5,-7.55) 11(-1,-7.55) 12(-0.5,-7.55) 13(0,-7.55) 14(0.5,-7.55) 15(1,-7.55) 16(1.5,-7.55) 17(2,-7.55) 18(2.5,-7.55) 19(3,-7.55) 20(3.5,-7.55) 21(4,-7.55) 22(4.5,-7.55) 23(5,-7.55) 24(5.5,-7.55) 25(6,-7.55) 51(6,7.55) 52(5.5,7.55) 53(5,7.55) 54(4.5,7.55) 55(4,7.55) 56(3.5,7.55) 57(3,7.55) 58(2.5,7.55) 59(2,7.55) 60(1.5,7.55) 61(1,7.55) 62(0.5,7.55) 63(0,7.55) 64(-0.5,7.55) 65(-1,7.55) 66(-1.5,7.55) 67(-2,7.55) 68(-2.5,7.55) 69(-3,7.55) 70(-3.5,7.55) 71(-4,7.55) 72(-4.5,7.55) 73(-5,7.55) 74(-5.5,7.55) 75(-6,7.55)
  oval 1.8x0.28 smd: 26(7.55,-6) 27(7.55,-5.5) 28(7.55,-5) 29(7.55,-4.5) 30(7.55,-4) 31(7.55,-3.5) 32(7.55,-3) 33(7.55,-2.5) 34(7.55,-2) 35(7.55,-1.5) 36(7.55,-1) 37(7.55,-0.5) 38(7.55,0) 39(7.55,0.5) 40(7.55,1) 41(7.55,1.5) 42(7.55,2) 43(7.55,2.5) 44(7.55,3) 45(7.55,3.5) 46(7.55,4) 47(7.55,4.5) 48(7.55,5) 49(7.55,5.5) 50(7.55,6) 76(-7.55,6) 77(-7.55,5.5) 78(-7.55,5) 79(-7.55,4.5) 80(-7.55,4) 81(-7.55,3.5) 82(-7.55,3) 83(-7.55,2.5) 84(-7.55,2) 85(-7.55,1.5) 86(-7.55,1) 87(-7.55,0.5) 88(-7.55,0) 89(-7.55,-0.5) 90(-7.55,-1) 91(-7.55,-1.5) 92(-7.55,-2) 93(-7.55,-2.5) 94(-7.55,-3) 95(-7.55,-3.5) 96(-7.55,-4) 97(-7.55,-4.5) 98(-7.55,-5) 99(-7.55,-5.5) 100(-7.55,-6)
  silkscreen extent -6.8,-8.05 6.25,6.25
OSC-SMD_4P-L3.2-W2.5-BL [mm]
  round 0 smd: 1(-1.1,-0.8)
  rect 1.4x1.15 smd: 2(1.1,-0.8) 3(1.1,0.8) 4(-1.1,0.8)
  Top Layer region: -1.8,-0.225 -0.762,-0.225 -0.4,-0.604 -0.4,-1.375 -1.8,-1.375
  silkscreen extent -2.1,-2.35 2.1,1.7
R0603 [mm]
  rect 0.8x0.9 smd: 1(-0.7,0) 2(0.7,0)
  silkscreen extent -1.4,-0.75 1.4,0.76
R0805 [mm]
  rect 1x1.55 smd: 1(-1,0) 2(1,0)
  silkscreen extent -1.75,-1.02 1.75,1.02
R1206 [mm]
  rect 1.2x1.9 smd: 1(-1.6,0) 2(1.6,0)
  silkscreen extent -2.5,-1.2 2.5,1.2
R2512 [mm]
  rect 1.6x3.3 smd: 1(-3.25,0) 2(3.25,0)
  silkscreen extent -4.3,-1.9 4.3,1.9
RES-ARRAY-SMD_0603-8P-L3.2-W1.6-BL [mm]
  rect 0.65x0.8 smd: 1(-1.2,-0.8) 4(1.2,-0.8) 5(1.2,0.8) 8(-1.2,0.8)
  rect 0.5x0.8 smd: 2(-0.4,-0.8) 3(0.4,-0.8) 6(0.4,0.8) 7(-0.4,0.8)
  silkscreen extent -1.87,-1.45 1.87,1.47
RES-TH_L12.5-W3.1-P7.50-D1.2-S1.80 [mm]
  round 2 hole 1.2: 1(-3.749,0.899) 2(3.749,-0.899)
  silkscreen extent -6.25,-1.56 6.25,1.55
SMA_L4.4-W2.6-LS5.0-RD [mm]
  rect 2x1.8 smd: 1(-2,0) 2(2,0)
  silkscreen extent -2.3,-1.4 2.3,1.4
SMB_L4.6-W3.6-LS5.3-BI [mm]
  rect 2.3x2.7 smd: 1(-2.2,0) 2(2.2,0)
  silkscreen extent -2.45,-2 2.45,2
SMBF_L4.3-W3.6-LS5.3-RD [mm]
  rect 2x2.6 smd: 1(-2.4,0) 2(2.4,0)
  silkscreen extent -2.2,-1.9 2.2,1.9
SOIC16N [mm]
  rect 0.65x1.75 smd: 1(-4.445,-2.799) 2(-3.175,-2.799) 3(-1.905,-2.799) 4(-0.635,-2.799) 5(0.635,-2.799) 6(1.905,-2.799) 7(3.175,-2.799) 8(4.445,-2.799) 9(4.445,2.799) 10(3.175,2.799) 11(1.905,2.799) 12(0.635,2.799) 13(-0.635,2.799) 14(-1.905,2.799) 15(-3.175,2.799) 16(-4.445,2.799)
  silkscreen extent -5,-2 5,2
SOIC-8_L4.9-W3.9-P1.27-LS6.0-BL [mm]
  oval 0.6x1.52 smd: 1(-1.905,-2.74) 2(-0.635,-2.74) 3(0.635,-2.74) 4(1.905,-2.74) 5(1.905,2.74) 6(0.635,2.74) 7(-0.635,2.74) 8(-1.905,2.74)
  silkscreen extent -2.86,-2.86 2.5,2
SOIC-8_L5.0-W4.0-P1.27-LS6.0-BL-EP [mm]
  oval 0.6x1.8 smd: 1(-1.905,-2.972) 2(-0.635,-2.972) 3(0.635,-2.972) 4(1.905,-2.972) 5(1.905,2.972) 6(0.635,2.972) 7(-0.635,2.972) 8(-1.905,2.972)
  rect 3.45x2.56 smd: 9(0,0)
  silkscreen extent -2.84,-2.56 2.39,1.83
SOIC-16_L9.9-W3.9-P1.27-LS6.0-BL [mm]
  oval 0.6x1.8 smd: 1(-4.445,-2.972) 2(-3.175,-2.972) 3(-1.905,-2.972) 4(-0.635,-2.972) 5(0.635,-2.972) 6(1.905,-2.972) 7(3.175,-2.972) 8(4.445,-2.972) 9(4.445,2.972) 10(3.175,2.972) 11(1.905,2.972) 12(0.635,2.972) 13(-0.635,2.972) 14(-1.905,2.972) 15(-3.175,2.972) 16(-4.445,2.972)
  silkscreen extent -4.98,-1.85 4.98,1.83
SOP-8_L4.9-W3.9-P1.27-LS6.0-BL [mm]
  oval 0.6x1.6 smd: 1(-1.905,-3) 2(-0.635,-3) 3(0.635,-3) 4(1.905,-3) 5(1.905,3) 6(0.635,3) 7(-0.635,3) 8(-1.905,3)
  silkscreen extent -2.84,-2.74 2.5,1.9
SOT-23-3_L2.9-W1.3-P1.90-LS2.4-BR [mm]
  rect 1.25x0.7 smd: 1(1.25,-0.95) 2(1.25,0.95) 3(-1.25,0)
  silkscreen extent -0.65,-1.46 0.9,1.46
SOT-23-3_L2.9-W1.6-P1.90-LS2.8-BR [mm]
  rect 1.25x0.7 smd: 1(1.25,-0.95) 2(1.25,0.95)
  rect 1.5x3 smd: 3(-1.25,0)
  silkscreen extent -0.65,-1.46 0.9,1.46
SOT-23-3_L3.0-W1.7-P0.95-LS2.9-BR [mm]
  rect 1.25x0.7 smd: 1(1.25,-0.95) 2(1.25,0.95) 3(-1.25,0)
  silkscreen extent -0.9,-1.6 0.9,1.6
SOT-143_L2.9-W1.3-P1.92-LS2.3-BL [mm]
  rect 1.1x0.7 smd: 1(-0.75,-1.2)
  rect 0.6x0.7 smd: 2(0.95,-1.2) 3(0.95,1.2) 4(-0.95,1.2)
  silkscreen extent -1.91,-1.4 1.55,0.7
SOT-223_L6.7-W3.5-P2.30-BR [mm]
  rect 2.2x1.1 smd: 1(3.099,-2.3) 2(3.099,0) 3(3.099,2.3)
  rect 2.2x3.5 smd: 4(-3.099,0)
  silkscreen extent -1.8,-3.55 1.8,3.55
SOT-753_L3.1-W1.7-P0.95-LS3.0-BR [mil]
  rect 47.2x21.7 smd: 1(51,-37) 2(51,0) 3(51,37) 4(-51,37) 5(-51,-37)
  silkscreen extent -32,-56 32,56
SW-TH_DSWB04LHGET [mm]
  round 1.8 hole 1.2: 1(-3.81,3.81) 2(-1.27,3.81) 3(1.27,3.81) 4(3.81,3.81) 5(-3.81,-3.81) 6(-1.27,-3.81) 7(1.27,-3.81) 8(3.81,-3.81)
  silkscreen extent -5.9,-4.8 5.9,4.8
TO-252-2_L6.5-W6.1-P4.58-LS10.0-TR [mm]
  rect 1.35x2.2 smd: 1(2.29,3.876) 3(-2.29,3.871)
  rect 6x6.5 smd: 4(0,-3.876)
  silkscreen extent -3.57,-7.64 3.57,1.61

## Free pads (board coordinates)
  round 7 hole 3.5: 0(46.949,54.178) 0(46.949,140.178) 0(196.949,140.178) 0(196.949,54.178)
  round 1 smd: 1(118.911,65.946) 1(125.226,85.986) 1(144.118,85.18)
  round 0.8 smd: 1(147.994,98.708) 1(167.171,82.071) 1(167.806,83.341)

## Via types
v1: diameter 0.61, hole 0.305, Top Layer to Bottom Layer, 814 vias

## Nets (pads, with @x,y where several pads share a name; then routed paths per layer and width w, separated by ;. In a path a pad name is that pad's centre, name@x,y a point inside that pad or via, vN(x,y) a via of type N, cw(c..) or ccw(c..) an arc to the next point about the centre after c; other vN are vias at no path point)
12V_PWM_EN_PB6: Q3.1 Q16.1 U6.92 | length 67.4
  Top Layer w0.254: v1(147.74,91.088) 148.088,90.74 U6.92@152.001,90.739
  Top Layer w0.5: Q16.1@106.953,65.627 107.42,65.627 v1(108.878,67.085) 109.447,67.654 Q3.1@111.692,67.654
  Bottom Layer w0.254: v1(108.878,67.085) 109.259,66.704 122.34,66.704 126.277,70.641 126.277,84.865 132.5,91.088 v1(147.74,91.088)
ADC1_P: C104.2 R133.2 U6.34 | length 66.9
  Top Layer w0.254: U6.34@167.1,90.74 169.297,90.74 171.108,88.929 v1(172.378,88.929)
  Top Layer w0.5: R133.2@179.998,133.059 180.059,132.998 v1(183.554,132.998)
  Bottom Layer w0.5: v1(172.378,88.929) 181.014,88.929 184.27,92.185 184.27,106.671 187.618,110.019 187.618,129.188 183.808,132.998 v1(183.554,132.998)
ADC2_P: C105.2 R136.2 U6.33 | length 65.9
  Top Layer w0.254: U6.33@167.1,90.24 169.035,90.24 171.108,88.167 v1(173.14,88.167)
  Top Layer w0.5: R136.2@188.888,133.059 190.92,133.059 v1(190.92,132.109)
  Bottom Layer w0.5: v1(173.14,88.167) 181.268,88.167 185.035,91.934 185.035,105.134 188.567,108.667 188.567,127.217 190.92,129.569 v1(190.92,132.109)
AGND: C49.2 C50.2 R25.2 U6.19 U6.20 | length 9.4
  Top Layer w0.254: U6.19@162.551,85.189 162.551,83.897 162.795,83.654 163.051,83.91 U6.20@163.051,85.189
  Top Layer w0.5: 162.795,83.654 163.422,83.026 163.422,81.944 163.422,78.261 R25.2@163.107,77.946
BOOT0: R23.2 U6.94 | length 7.3
  Top Layer w0.254: R23.2@145.266,91.215 146.742,89.739 U6.94@152.001,89.739
C10_2: C10.2 U1.1
C35_1: C35.1 R13.1 RS1.2 | length 8.9
  Top Layer w0.5: R13.1@188.318,67.593 195.746,67.593 RS1.2@196.762,66.577
C36_1: C36.1 R14.1 RS1.3 | length 8.9
  Top Layer w0.5: R14.1@188.318,69.498 195.721,69.498 RS1.3@196.762,70.54
C99_2: C99.2 R131.1 | length 2.6
  Top Layer w2: C99.2@60.821,63.656 R131.1@63.463,63.656
D1_1: C2.2 D1.1 D2.1 L1.1 L2.2 | length 48
  Top Layer w2: C2.2@58.57,121.568 67.994,121.568 L1.1@73.619,115.944
  Bottom Layer w2: L2.2@45.966,115.944 49.558,119.536 70.027,119.536 L1.1@73.619,115.944
D1_2: C1.2 D1.2 D2.2 D3.2 F1.2 R1.2 | length 27.5
  Top Layer w3: D2.2@62.142,126.254 60.049,128.347 R1.2@60.049,129.178 ; D1.2@66.714,126.254 66.701,126.267 58.246,126.267 58.246,127.375 R1.2@60.049,129.178 ; F1.2@67.095,134.268 66.206,133.379 C1.2@60.186,133.379 60.049,133.379 R1.2@60.049,129.178
D3_1: C1.1 C2.1 C9.2 D3.1 JP1.2 JP2.1 JP2.3 L1.2 L2.1 R1.1 R5.2 | length 80.7
  Top Layer w3: C9.2@44.87,131.144 52.383,131.144 R1.1@52.551,130.976 52.551,125.698 55.538,122.711 55.538,116.371 L2.1@55.966,115.944 ; 51.084,131.144 54.446,131.144 56.3,132.998 56.3,135.665 58.208,137.573 JP1.2@58.208,139.983 ; L2.1@55.966,115.944 L1.2@63.619,115.944
  Bottom Layer w3: R1.1@52.551,130.976 54.319,132.744 61.634,132.744 63.285,131.093 68.365,131.093 73.239,135.967 ; 73.239,135.967 75.027,137.756 JP2.3@77.44,137.756 JP2.1@73.239,137.756 73.239,135.967
D16_3: D16.3 J3.1 R132.1 R133.1 R134.2 | length 14.1
  Top Layer w0.5: R132.1@177.65,132.998 179.114,134.461 R133.1@179.998,134.46 179.853,134.606 179.853,137.75 ; D16.3@178.073,135.792 179.853,135.792 ; J3.1@179.853,141.507 179.853,136.554 R134.2@180.95,136.554
DGND: C3.2 C4.1 C5.2 C6.1 C8.2 C11.1 C12.2 C13.1 C14.1 C15.2 C17.1 C18.1 C20.1 C21.2 C22.1 C23.2 C24.1 C25.1 C26.2 C27.1 C28.1 C30.2 C31.2 C32.1 C35.2 C36.2 C37.2 C39.1 C40.2 C41.2 C42.1 C43.2 C44.2 C45.2 C46.2 C47.2 C48.2 C51.1 C52.2 C53.2 C54.2 C55.2 C56.1 C57.1 C58.2 C59.2 C60.2 C62.1 C66.2 C67.2 C68.2 C69.2 C70.2 C71.1 C72.1 C73.1 C74.1 C75.1 C76.1 C77.1 C78.1 C79.1 C80.1 C81.1 C82.2 C83.2 C84.2 C85.2 C86.2 C87.2 C88.2 C89.2 C90.1 C92.1 C93.1 C94.1 C95.2 C96.1 C97.2 C104.1 C105.1 CN1.3 D5.2 D6.2 D7.2 D8.1 D9.2 D16.1 D17.1 J2.1 J3.2 J4.2 J10.1 J11.1 L1.3 L2.4 LED1.2 LED9.2 Q2.2 Q16.2 Q17.2 Q19.2 Q20.2 Q21.2 Q22.2 Q23.2 Q24.2 Q25.2 Q26.2 Q27.2 Q28.2 Q29.2 Q30.2 R7.1 R8.1 R11.1 R12.1 R20.1 R23.1 R25.1 R75.1 R76.1 R82.1 R104.2 R105.2 R106.2 R119.2 R120.2 R121.2 R124.1 R125.1 R126.2 R127.1 R128.2 R129.1 R134.1 R137.1 RS1.1 RS2.1 SW1.5 SW1.6 SW1.7 SW1.8 U1.7 U1.9 U2.1 U3.7 U3.9 U4.15 U5.1 U6.10 U6.27 U6.49 U6.74 U6.99 U7.8 U8.8 U9.8 U10.8 U11.8 U12.5 U12.8 U13.8 U14.3 U15.8 U16.8 U17.8 U18.8 U19.8 U20.0 U20.4 U20.8 U21.0 U21.4 U21.8 X1.2 | length 185
  Top Layer w0.254: U12.8@137.326,98.53 140.285,98.53 ; 143.206,98.53 LED1.2@143.93,99.254 ; C45.2@148.629,86.582 149.287,87.24 U6.99@152.001,87.239 ; C44.2@154.029,103.534 154.052,103.511 U6.74@154.052,100.288 ; X1.2@157.095,75.175 158.454,73.816 159.99,73.816 U5.1@161.189,75.015 ; R20.1@161.014,76.864 162.787,76.864 163.107,76.544 163.107,75.02 C47.2@163.422,74.705
  Top Layer w0.3: v1@73.62,80.595 73.191,80.166 73.191,78.068 R124.1@74.395,76.864 ; v1(73.621,80.596) 74.461,81.436 v1(74.838,81.436) 79.033,81.436 81.827,78.642
  Top Layer w0.5: C8.2@48.525,98.962 48.746,98.741 Q2.2@48.746,93.735 ; Q29.2@53.318,98.053 53.318,99.856 R120.2@53.694,100.232 ; Q25.2@57.89,89.163 57.062,89.991 57.062,95.193 57.062,97.047 Q28.2@58.068,98.053 58.068,99.907 R119.2@58.393,100.232 ; 102.782,81.436 v1(102.782,84.271) C20.1@102.782,86.404 ; C17.1@106.785,69.625 R7.1@109.574,69.625 ; C27.1@106.912,83.722 R11.1@109.574,83.722 ; v1(109.132,74.451) 109.132,74.324 U1.7@111.342,74.324 115.035,74.324 R8.1@115.289,74.578 ; U3.7@111.469,88.294 115.289,88.294 R12.1@115.543,88.548 ; U9.8@111.926,107.166 111.926,108.487 112.561,109.122 125.896,109.122 U11.8@125.896,107.166 ; 124.176,109.122 139.104,109.122 139.866,108.36 U13.8@139.866,107.166 139.866,103.28 137.326,100.74 U12.8@137.326,98.53 ; R75.1@155.36,121.746 155.36,121.507 C90.1@158.662,118.205 ; C39.1@156.823,69.117 156.823,74.901 X1.2@157.095,75.175 ; R20.1@161.014,76.864 161.014,75.193 U5.1@161.189,75.015 ; R25.1@163.107,76.544 163.107,73.242 C42.1@163.422,72.927 ; D9.2@167.537,61.497 167.537,54.451 J10.1@167.605,54.385 ; C84.2@169.244,131.199 188.212,131.2 C73.1@188.253,131.158 ; 175.573,137.504 175.573,139.732 J3.2@177.349,141.507 ; D17.1@184.59,136.742 184.59,138.716 J4.2@187.382,141.507
  Top Layer w1: 135.396,79.023 135.396,78.208 135.396,75.924 U19.8@136.31,75.01
  Top Layer w2: L2.4@55.966,111.444 L1.3@63.619,111.444
  other v1: 110.148,51.718 96.686,52.607 123.61,53.496 164.504,54.385 96.813,54.766 124.499,55.147 127.039,55.147 129.325,55.147 113.45,55.401 166.282,56.036 163.234,56.163 100.75,56.417 103.29,56.544 105.83,56.544 115.482,56.798 113.323,57.052 165.012,57.56 96.178,58.068 115.609,58.449 185.713,58.449 75.096,59.211 54.903,60.735 75.731,60.989 191.428,60.989 53.379,61.116 178.855,61.243 190.666,63.021 53.887,63.275 178.982,63.656 181.141,63.783 74.207,64.926 166.79,64.926 72.81,65.053 51.347,65.561 58.111,65.872 59,65.872 59.889,65.872 60.778,65.872 61.667,65.872 62.556,65.872 63.445,65.872 64.334,65.872 65.223,65.872 66.112,65.872 78.939,65.872 79.828,65.872 80.717,65.872 81.606,65.872 82.495,65.872 83.384,65.872 84.273,65.872 85.162,65.872 86.051,65.872 86.94,65.872 181.014,66.196 178.982,66.323 59.889,66.761 60.778,66.761 61.667,66.761 62.556,66.761 63.445,66.761 64.334,66.761 80.717,66.761 81.606,66.761 82.495,66.761 83.384,66.761 84.273,66.761 85.162,66.761 167.679,66.831 53.252,67.339 74.715,67.339 59.889,67.65 60.778,67.65 61.667,67.65 62.556,67.65 63.445,67.65 64.334,67.65 80.717,67.65 81.606,67.65 82.495,67.65 83.384,67.65 84.273,67.65 85.162,67.65 73.572,67.72 122.848,68.482 59.889,68.539 60.778,68.539 61.667,68.539 62.556,68.539 63.445,68.539 64.334,68.539 80.717,68.539 81.606,68.539 82.495,68.539 83.384,68.539 84.273,68.539 85.162,68.539 75.223,68.609 148.248,68.609 150.534,68.609 168.314,68.609 72.556,68.99 59.889,69.428 60.778,69.428 61.667,69.428 62.556,69.428 63.445,69.428 64.334,69.428 80.717,69.428 81.606,69.428 82.495,69.428 83.384,69.428 84.273,69.428 85.162,69.428 169.076,69.879 97.551,69.91 59.889,70.317 60.778,70.317 61.667,70.317 62.556,70.317 63.445,70.317 64.334,70.317 80.717,70.317 81.606,70.317 82.495,70.317 83.384,70.317 84.273,70.317 85.162,70.317 162.853,70.641 68.112,70.896 88.94,70.896 53.252,71.022 54.141,71.022 55.03,71.022 55.919,71.022 74.08,71.022 74.969,71.022 75.858,71.022 76.747,71.022 59.889,71.206 60.778,71.206 61.667,71.206 62.556,71.206 63.445,71.206 64.334,71.206 80.717,71.206 81.606,71.206 82.495,71.206 83.384,71.206 84.273,71.206 85.162,71.206 163.361,71.53 68.112,71.785 88.94,71.785 53.252,71.911 54.141,71.911 55.03,71.911 55.919,71.911 74.08,71.911 74.969,71.911 75.858,71.911 76.747,71.911 166.282,71.911 59.889,72.095 60.778,72.095 61.667,72.095 62.556,72.095 63.445,72.095 64.334,72.095 80.717,72.095 81.606,72.095 82.495,72.095 83.384,72.095 84.273,72.095 85.162,72.095 107.608,72.165 108.37,72.165 109.132,72.165 68.112,72.674 69.001,72.674 88.94,72.674 53.252,72.8 54.141,72.8 55.03,72.8 55.919,72.8 74.08,72.8 74.969,72.8 75.858,72.8 76.747,72.8 95.289,72.8 107.608,72.927 108.37,72.927 109.132,72.927 59.889,72.984 60.778,72.984 61.667,72.984 62.556,72.984 63.445,72.984 64.334,72.984 80.717,72.984 81.606,72.984 82.495,72.984 83.384,72.984 84.273,72.984 85.162,72.984 68.112,73.563 69.001,73.563 88.94,73.563 53.252,73.689 54.141,73.689 55.03,73.689 55.919,73.689 74.08,73.689 74.969,73.689 75.858,73.689 76.747,73.689 107.608,73.689 108.37,73.689 109.132,73.689 59.889,73.873 60.778,73.873 61.667,73.873 62.556,73.873 63.445,73.873 64.334,73.873 80.717,73.873 81.606,73.873 82.495,73.873 83.384,73.873 84.273,73.873 85.162,73.873 166.536,74.07 193.46,74.07 107.608,74.451 108.37,74.451 53.252,74.578 54.141,74.578 55.03,74.578 55.919,74.578 74.08,74.578 74.969,74.578 75.858,74.578 76.747,74.578 59.889,74.762 60.778,74.762 61.667,74.762 62.556,74.762 63.445,74.762 64.334,74.762 80.717,74.762 81.606,74.762 82.495,74.762 83.384,74.762 84.273,74.762 85.162,74.762 107.608,75.213 108.37,75.213 109.132,75.213 158.535,75.34 186.221,75.34 152.947,75.467 147.994,75.594 59.889,75.651 60.778,75.651 61.667,75.651 62.556,75.651 63.445,75.651 64.334,75.651 80.717,75.651 81.606,75.651 82.495,75.651 83.384,75.651 84.273,75.651 85.162,75.651 132.246,75.848 183.935,76.102 174.664,76.229 59.889,76.54 60.778,76.54 61.667,76.54 62.556,76.54 63.445,76.54 64.334,76.54 80.717,76.54 81.606,76.54 82.495,76.54 83.384,76.54 84.273,76.54 85.162,76.54 101.766,76.61 133.262,76.864 152.947,76.991 148.756,77.372 59.889,77.429 60.778,77.429 61.667,77.429 62.556,77.429 63.445,77.429 64.334,77.429 80.717,77.429 81.606,77.429 82.495,77.429 83.384,77.429 84.273,77.429 85.162,77.429 141.009,77.626 101.639,77.88 135.396,78.208 146.47,78.261 59.889,78.318 60.778,78.318 61.667,78.318 62.556,78.318 63.445,78.318 64.334,78.318 80.717,78.318 81.606,78.318 82.495,78.318 83.384,78.318 84.273,78.318 85.162,78.318 198.794,78.388 155.36,78.515 142.595,78.547 59.889,79.207 60.778,79.207 61.667,79.207 62.556,79.207 63.445,79.207 64.334,79.207 80.717,79.207 81.606,79.207 82.495,79.207 83.384,79.207 84.273,79.207 85.162,79.207 171.489,79.531 147.232,79.658 193.333,79.785 59.889,80.096 61.667,80.096 62.556,80.096 63.445,80.096 64.334,80.096 80.717,80.096 82.495,80.096 83.384,80.096 84.273,80.096 85.162,80.096 60.745,80.166 81.573,80.166 144.819,80.166 159.043,80.293 71.286,80.42 143.168,80.674 169.711,80.674 53.379,80.928 167.425,80.928 59.889,80.985 60.778,80.985 61.667,80.985 62.556,80.985 63.445,80.985 64.334,80.985 80.717,80.985 81.606,80.985 82.495,80.985 83.384,80.985 84.273,80.985 85.162,80.985 54.395,81.309 96.686,81.309 114.466,81.309 108.37,81.563 110.148,81.69 112.307,81.69 168.568,81.69 60.778,81.874 61.667,81.874 62.556,81.874 63.445,81.874 64.334,81.874 81.606,81.874 82.495,81.874 83.384,81.874 84.273,81.874 85.162,81.874 59.908,81.893 80.736,81.893 55.284,81.944 70.905,81.944 95.543,81.944 119.8,82.198 124.499,82.198 158.154,82.198 74.08,82.579 96.433,82.813 176.442,82.833 179.871,82.96 123.864,83.087 158.281,83.468 101.512,83.722 51.728,84.103 66.333,84.611 104.052,84.865 174.156,84.865 61.761,85.119 71.54,85.881 107.735,86.135 108.497,86.135 109.259,86.135 51.855,86.262 82.462,86.262 199.556,86.262 95.543,86.643 107.735,86.897 108.497,86.897 109.259,86.897 61.888,87.024 84.24,87.024 66.765,87.188 107.735,87.659 108.497,87.659 109.259,87.659 159.297,87.786 160.948,87.786 71.413,87.913 156.249,88.167 51.855,88.421 107.735,88.421 108.497,88.421 109.259,88.421 126.658,88.421 81.827,88.675 107.735,89.183 108.497,89.183 109.259,89.183 161.456,89.183 127.674,89.31 159.297,89.31 157.011,89.437 71.286,89.945 76.112,89.945 51.855,90.199 61.888,90.199 129.325,90.707 130.722,91.088 101.385,91.215 91.098,91.342 161.583,92.358 100.115,92.485 158.789,92.612 97.321,92.993 156.503,93.247 81.192,93.755 101.639,93.755 161.202,93.882 181.776,93.882 163.234,94.009 200.572,94.263 71.286,94.39 61.761,94.517 75.858,94.517 66.079,94.771 80.176,94.771 87.669,94.898 156.122,95.152 57.062,95.193 61.253,95.533 70.778,95.533 159.297,95.533 181.903,95.787 55.868,95.903 75.477,95.914 162.98,96.041 66.333,96.295 156.884,96.422 160.313,96.93 70.778,97.057 75.731,97.184 113.577,97.184 182.411,97.565 113.577,98.073 84.24,98.2 192.698,98.2 56.681,98.327 66.206,98.454 70.778,98.454 75.477,98.708 141.644,98.708 61.38,98.835 122.594,98.962 121.07,99.089 138.977,99.089 171.489,99.089 173.902,99.216 172.632,99.343 181.522,99.343 66.333,99.851 75.604,99.851 70.778,99.978 147.74,99.978 56.681,100.105 61.507,100.232 111.799,100.232 194.603,100.232 139.993,100.359 133.516,100.613 151.55,100.613 47.283,100.867 48.172,100.867 130.976,100.867 81.192,101.248 141.644,101.375 182.284,101.375 132.246,101.629 47.283,101.756 48.172,101.756 134.151,101.756 150.661,101.756 130.722,102.01 135.675,102.137 47.283,102.645 48.172,102.645 147.613,102.645 182.03,103.153 141.644,103.28 47.283,103.534 48.172,103.534 115.228,104.423 120.562,104.423 122.594,104.423 77.89,104.55 181.649,104.931 142.025,105.058 201.207,105.058 153.582,105.439 74.969,106.709 143.295,107.217 199.937,107.217 113.704,107.344 115.609,107.344 127.801,107.344 129.452,107.344 181.903,107.344 50.331,108.487 51.22,108.487 52.109,108.487 52.998,108.487 58.078,108.487 58.967,108.487 59.856,108.487 60.745,108.487 65.825,108.487 66.714,108.487 67.603,108.487 68.492,108.487 155.868,108.487 80.43,108.741 81.319,108.741 83.859,108.741 84.748,108.741 141.898,108.868 50.331,109.376 51.22,109.376 52.109,109.376 52.998,109.376 58.078,109.376 58.967,109.376 59.856,109.376 60.745,109.376 65.825,109.376 66.714,109.376 67.603,109.376 68.492,109.376 156.405,109.478 80.43,109.63 81.319,109.63 83.859,109.63 84.748,109.63 185.078,110.011 99.226,110.138 101.385,110.265 78.652,110.519 80.43,110.519 81.319,110.519 83.859,110.519 84.748,110.519 87.161,110.519 112.053,110.519 115.355,110.519 127.42,110.519 105.195,110.646 117.895,110.646 129.071,110.646 90.844,110.773 135.294,110.773 93.638,110.9 95.924,110.9 132.627,110.9 138.342,110.9 124.118,111.027 108.116,111.154 120.562,111.154 80.43,111.408 81.319,111.408 83.859,111.408 84.748,111.408 182.03,111.789 184.951,112.297 81.319,112.932 151.169,114.202 148.248,114.329 185.078,114.329 153.074,114.456 78.271,114.964 145.2,114.964 155.233,114.964 143.549,115.472 185.459,115.853 148.375,115.98 152.693,115.98 149.772,116.361 151.296,116.996 200.064,116.996 152.947,117.377 154.852,117.758 149.264,118.52 150.788,118.52 185.459,118.647 152.82,118.901 154.471,119.155 151.423,119.79 170.346,119.79 168.187,119.917 171.997,119.917 176.823,119.917 178.347,119.917 161.964,120.044 164.377,120.044 166.536,120.044 174.537,120.044 78.652,120.552 181.903,120.806 183.554,121.06 150.28,123.981 200.826,124.108 152.439,124.235 78.652,124.997 149.518,125.378 151.55,125.632 198.54,127.156 198.921,131.601 173.267,134.776 193.587,134.903 173.394,137.062 192.698,137.062 173.521,139.983 183.935,140.11
F4_2: C96.2 C97.1 F4.2 U21.12 | length 18.8
  Top Layer w0.6: U21.12@66.564,69.793 69.912,69.793 70.679,69.023
  Top Layer w1.5: C96.2@69.963,69.739 70.679,69.023 70.679,68.454
  Top Layer w2: 70.679,68.454 C97.1@70.679,62.767 72.521,60.925 F4.2@72.521,56.427
FCLK_8MHZ: R21.1 U6.12 | length 5.2
  Top Layer w0.254: R21.1@157.519,80.232 159.051,81.764 U6.12@159.051,84.809
FLASH_LED_PC10: LED2.2 U6.78 | length 6.9
  Top Layer w0.254: LED2.2@146.089,99.254 146.089,98.581 146.93,97.74 U6.78@152.001,97.739
INFRARED_PW_EN_PC9: R81.2 U6.36 | length 50.3
  Top Layer w0.254: U6.36@167.1,91.738 170.077,91.738 v1(170.092,91.723) ; R81.2@191.112,113.567 192.825,111.855 192.825,109.757 194.857,107.725 v1(194.857,107.598)
  Bottom Layer w0.254: v1(170.092,91.723) 170.092,90.199 172.886,87.405 181.522,87.405 188.507,94.39 188.507,98.073 194.857,104.423 v1(194.857,107.598)
J_NTRST: CN1.1 R17.1 U6.90 | length 27.7
  Top Layer w0.254: CN1.1@146.549,111.916 146.549,107.964 R17.1@146.724,107.791 ; v1(149.772,92.104) 150.138,91.738 U6.90@152.002,91.738
  Bottom Layer w0.254: CN1.1@146.549,111.916 148.883,109.582 148.883,92.993 v1(149.772,92.104)
L3_1: C10.1 D5.1 L3.1 U1.8
  other v1: 106.084,78.896 113.831,78.896 106.084,79.658 113.831,79.658
LED2_1: LED2.1 R22.1 | length 2.1
  Top Layer w0.5: LED2.1@146.089,100.956 R22.1@146.089,103.087
LED3_1: LED3.1 R86.1 | length 2
  Top Layer w0.5: LED3.1@123.318,64.418 R86.1@125.324,64.418
LED7_1: LED7.1 R90.1 | length 2
  Top Layer w0.5: LED7.1@153.671,64.418 R90.1@155.677,64.418
LED9_1: LED9.1 R140.2 | length 2.4
  Top Layer w0.5: R140.2@127.231,71.657 129.541,71.657 LED9.1@129.579,71.619
M1_IN1: Q19.3 R92.2 U20.3 | length 16.1
  Top Layer w0.3: Q19.3@73.318,86.536 72.617,85.835 72.617,84.484 72.617,76.803 73.628,75.792 U20.3@78.294,75.792
M1_IN2: Q20.3 R93.2 U20.5 | length 24
  Top Layer w0.3: Q20.3@68.365,86.536 67.664,85.835 67.664,84.484 67.664,83.661 68.942,82.384 68.942,80.631 71.921,77.652 71.921,71.784 73.912,69.793 U20.5@78.293,69.792
M1_OUT1: C98.1 C100.2 J9.1 U20.7 | length 20
  Top Layer w0.6: U20.7@78.294,67.791 77.199,67.791 76.366,66.958 76.366,65.104 78.195,63.275 78.195,55.198 J9.1@78.754,54.639
  Top Layer w1.5: 76.366,66.958 76.366,65.104 C98.1@78.195,63.275
M1_OUT2: C101.2 J9.3 R130.2 U20.10 | length 19.5
  Top Layer w0.6: J9.3@86.678,54.639 87.237,55.198 87.237,63.275 89.193,65.231 89.193,66.958 88.36,67.791 U20.10@87.392,67.791
  Top Layer w1.5: R130.2@87.623,63.661 89.193,65.231 89.193,66.958
M1_PWM: Q21.3 R94.2 U20.15 | length 20.8
  Top Layer w0.3: Q21.3@78.017,86.536 77.164,85.683 77.164,84.484 77.164,83.687 77.763,83.087 86.018,83.087 88.812,80.293 88.812,77.499 88.106,76.793 U20.15@87.392,76.793
M2_IN1: Q25.3 R107.2 U21.3 | length 20.7
  Top Layer w0.3: U21.3@57.466,75.792 52.673,75.792 52.109,76.356 52.109,81.563 53.506,82.96 56.869,82.96 58.266,84.357 58.266,86.089 Q25.3@58.84,86.663